# Altium PCB 64 Electrode Inverted Microscope.PcbDoc
Units mm, origin at the board's own origin, x right, y up, seen from the top; angles counter-clockwise.
Board outline 30 x 30 mm, 2 copper layers (Top Layer, Bottom Layer); 2 components, 65 nets, 130 pads, 0 vias.
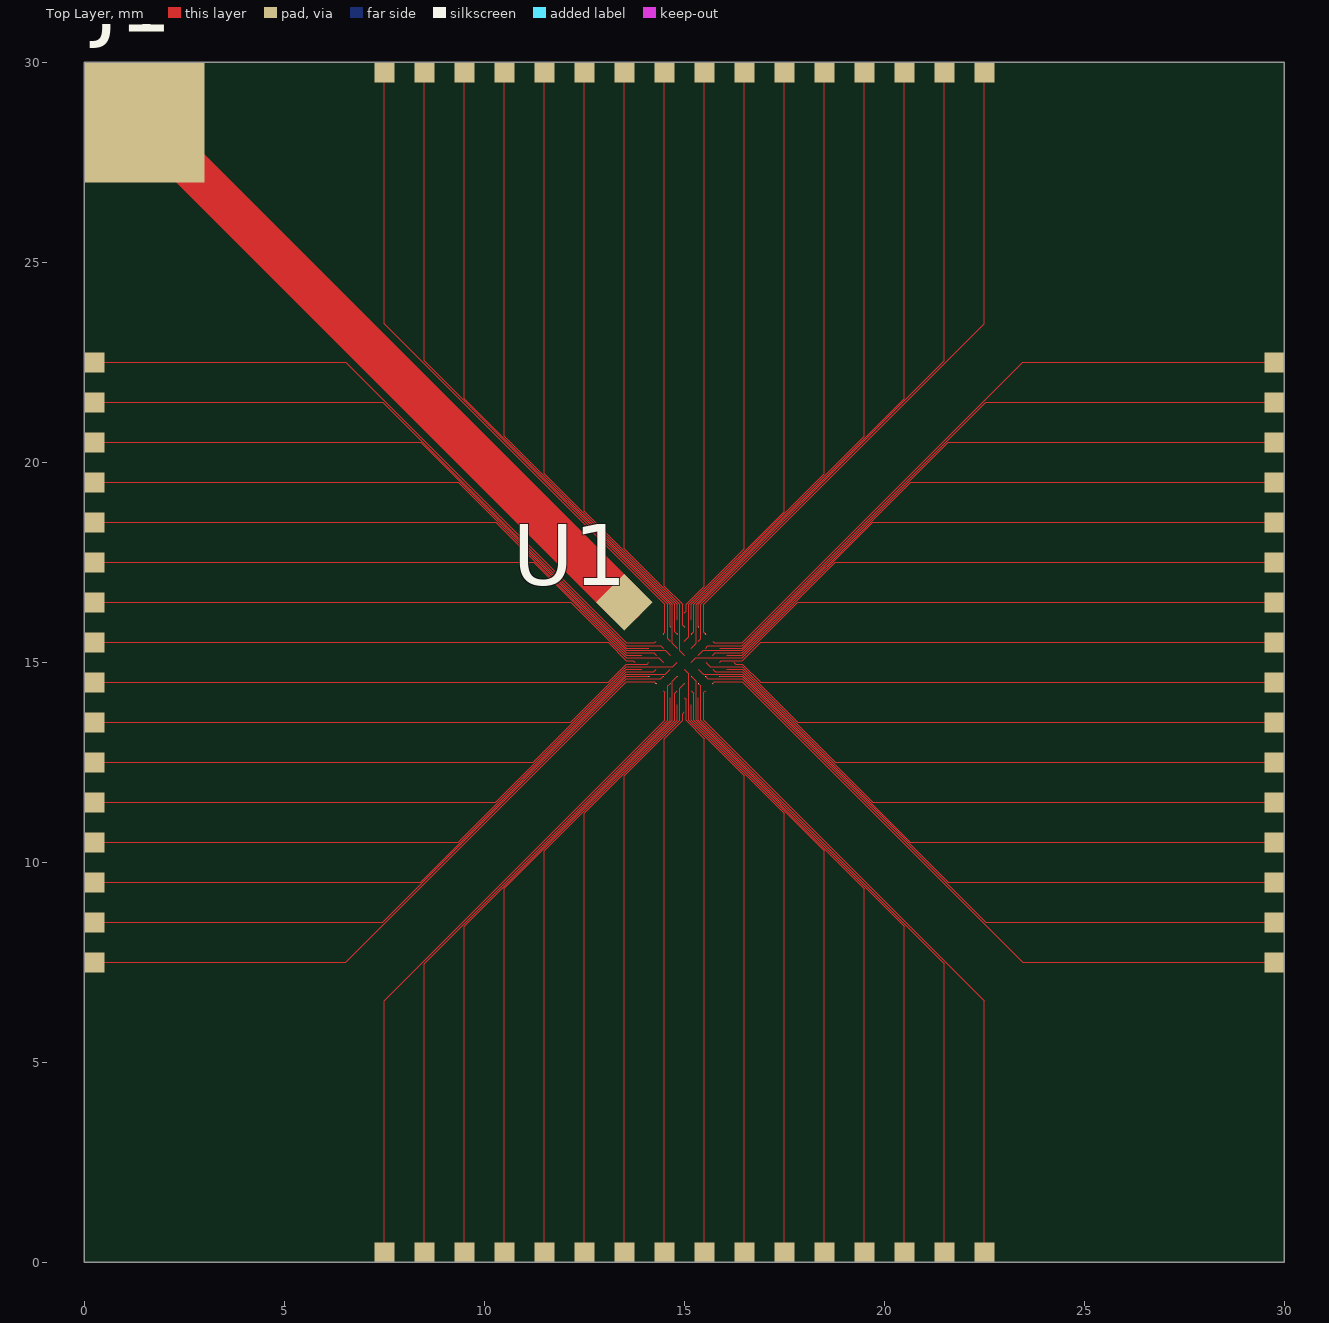
[diagram p0: Top Layer view]
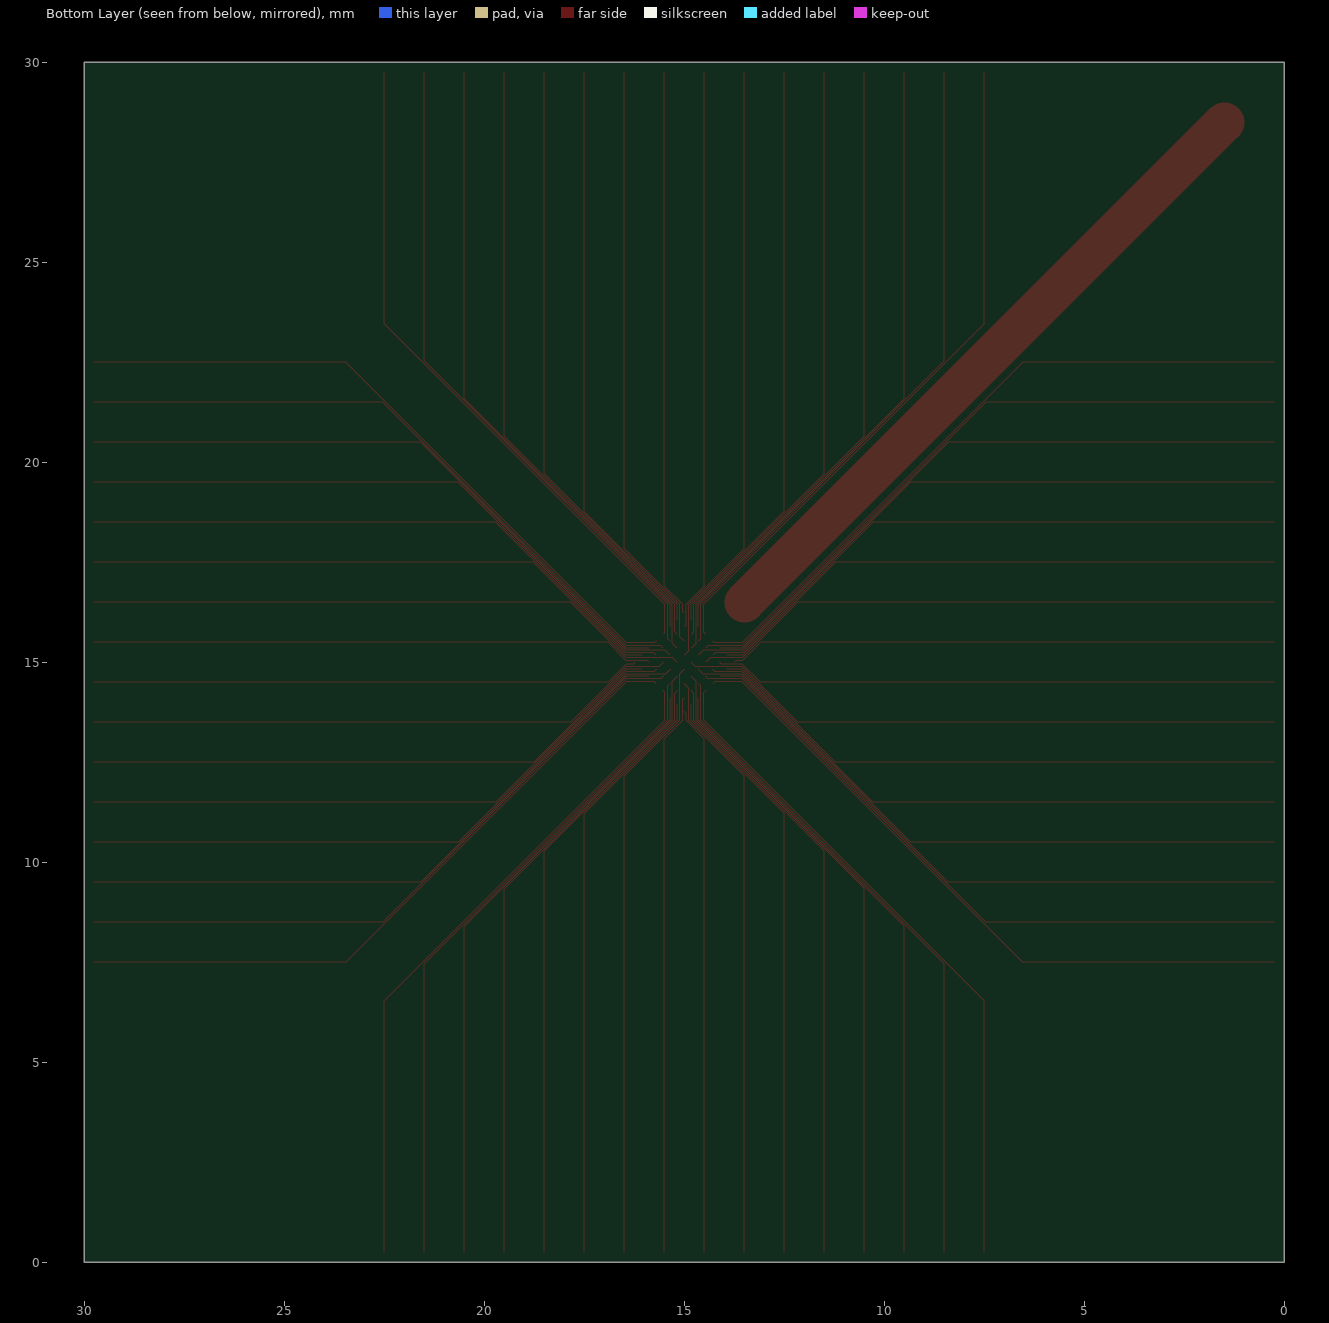
[diagram p1: Bottom Layer view, seen from below]

## Layer stack, top to bottom
Top Solder: solder mask 0.0102, Solder Resist, Dk 3.5
Top Layer: signal copper 0.0356
Dielectric 1: dielectric 0.32, FR-4, Dk 4.8
Bottom Layer: signal copper 0.0356
Bottom Solder: solder mask 0.0102, Solder Resist, Dk 3.5

## Board outline
0,0 0,30 30,30 30,0

## Design rules (kind name [scope] priority, off if disabled: settings)
Clearance [All] p1: gap=0.254 ignorepadtopadclearanceinfootprint=TRUE except(0: Arc-Hole Track-Hole SMDPad-Hole THPad-Hole Via-Hole Fill-Hole Poly-Hole Region-Hole Text-Hole; 0.005: Arc-Arc Arc-Track Arc-SMDPad Track-Track Track-SMDPad; 0.015: Arc-THPad Arc-Via Track-THPad Track-Via)
ComponentClearance [All] p1: gap=0 collisioncheckmode=3 verticalgap=0 showdistances=FALSE
PolygonConnect [All] p1: connectstyle=Relief reliefconductorwidth=0.254 reliefentries=4 polygonreliefangle="90 Angle" airgapwidth=0.254
RoutingVias [All] p1: holewidth=0.711 width=1.27 viastyle="Through Hole" minholewidth=0.711 minwidth=1.27 maxholewidth=0.711 maxwidth=1.27
SolderMaskExpansion [All] p1: expansion=0.102 istentingtop=FALSE
Width [All] p1: maxlimit=1 minlimit=0.005 preferedwidth=0.254 toplayer_prefwidth=0.25 bottomlayer_minwidth=0.254 bottomlayer_maxwidth=0.254 minimp=50.000000 maximp=50.000000 favimp=50.000000
29 further rules are at their usual default settings.

## Components (designator, comment, footprint, x,y, rotation, side; value= is the part's Value field where it differs from the comment)
J1 "Bond Pads (64)" "64 Electrode Footprint (Inverted Microscope)" 0,0 r0 top locked
U1 "Sensing Electrodes (64)" "64 Electrode Sensing Area (Inverted Microscope)" 15,16.237 r315 top locked

## Footprints (in the part's own frame and the unit in brackets; to place one, negate y for a bottom-side part, rotate by r counter-clockwise, add the part's x,y. Pads: shape width x height; smd on the part's side, far side on the other; paste and mask are expansions set on the pad)
"64 Electrode Footprint (Inverted Microscope)" [mm]
  rect 0.5x0.5 smd mask+0.102: 1(7.5,29.75) 2(8.5,29.75) 3(9.5,29.75) 4(10.5,29.75) 5(11.5,29.75) 6(12.5,29.75) 7(13.5,29.75) 8(14.5,29.75) 9(15.5,29.75) 10(16.5,29.75) 11(17.5,29.75) 12(18.5,29.75) 13(19.5,29.75) 14(20.5,29.75) 15(21.5,29.75) 16(22.5,29.75) 17(29.75,22.5) 18(29.75,21.5) 19(29.75,20.5) 20(29.75,19.5) 21(29.75,18.5) 22(29.75,17.5) 23(29.75,16.5) 24(29.75,15.5) 25(29.75,14.5) 26(29.75,13.5) 27(29.75,12.5) 28(29.75,11.5) 29(29.75,10.5) 30(29.75,9.5) 31(29.75,8.5) 32(29.75,7.5) 33(22.5,0.25) 34(21.5,0.25) 35(20.5,0.25) 36(19.5,0.25) 37(18.5,0.25) 38(17.5,0.25) 39(16.5,0.25) 40(15.5,0.25) 41(14.5,0.25) 42(13.5,0.25) 43(12.5,0.25) 44(11.5,0.25) 45(10.5,0.25) 46(9.5,0.25) 47(8.5,0.25) 48(7.5,0.25) 49(0.25,7.5) 50(0.25,8.5) 51(0.25,9.5) 52(0.25,10.5) 53(0.25,11.5) 54(0.25,12.5) 55(0.25,13.5) 56(0.25,14.5) 57(0.25,15.5) 58(0.25,16.5) 59(0.25,17.5) 60(0.25,18.5) 61(0.25,19.5) 62(0.25,20.5) 63(0.25,21.5) 64(0.25,22.5)
  rect 3x3 smd mask+0.102: 65(1.5,28.5)
"64 Electrode Sensing Area (Inverted Microscope)" [mm]
  round 0.01 smd mask+0.102: 1(0,0) 2(0.25,0) 3(0.5,0) 4(0.75,0) 5(1,0) 6(1.25,0) 7(1.5,0) 8(1.75,0) 9(0,-0.25) 10(0.25,-0.25) 11(0.5,-0.25) 12(0.75,-0.25) 13(1,-0.25) 14(1.25,-0.25) 15(1.5,-0.25) 16(1.75,-0.25) 17(0,-0.5) 18(0.25,-0.5) 19(0.5,-0.5) 20(0.75,-0.5) 21(1,-0.5) 22(1.25,-0.5) 23(1.5,-0.5) 24(1.75,-0.5) 25(0,-0.75) 26(0.25,-0.75) 27(0.5,-0.75) 28(0.75,-0.75) 29(1,-0.75) 30(1.25,-0.75) 31(1.5,-0.75) 32(1.75,-0.75) 33(0,-1) 34(0.25,-1) 35(0.5,-1) 36(0.75,-1) 37(1,-1) 38(1.25,-1) 39(1.5,-1) 40(1.75,-1) 41(0,-1.25) 42(0.25,-1.25) 43(0.5,-1.25) 44(0.75,-1.25) 45(1,-1.25) 46(1.25,-1.25) 47(1.5,-1.25) 48(1.75,-1.25) 49(0,-1.5) 50(0.25,-1.5) 51(0.5,-1.5) 52(0.75,-1.5) 53(1,-1.5) 54(1.25,-1.5) 55(1.5,-1.5) 56(1.75,-1.5) 57(0,-1.75) 58(0.25,-1.75) 59(0.5,-1.75) 60(0.75,-1.75) 61(1,-1.75) 62(1.25,-1.75) 63(1.5,-1.75) 64(1.75,-1.75)
  rect 1x1 smd mask+0.102: 65(-1.246,-0.875)

## Part data
J1: library part "Bond Pads (64—Inverted Microscope)", "64 Bond pads for 64 channel inverted microscope wa", Part Number="Bond Pads (64—Inverted Microscope)"
U1: library part "64 Electrode Sensing Area (Inverted Microscope)", "64 electrodes covering a 2 mm by 2mm area", Part Number="64 Electrode Sensing Area (Inverted Microscope)"

## Nets (pads, with @x,y where several pads share a name; then routed paths per layer and width w, separated by ;. In a path a pad name is that pad's centre, name@x,y a point inside that pad or via, vN(x,y) a via of type N, cw(c..) or ccw(c..) an arc to the next point about the centre after c; other vN are vias at no path point)
NetJ1_1: J1.9 U1.1 | length 13.7
  Top Layer w0.006: U1.1 15.045,16.282 15.045,16.45 15.5,16.905 15.5,29.249 J1.9
NetJ1_2: J1.11 U1.2 | length 14.7
  Top Layer w0.006: U1.2 15.177,16.448 17.5,18.77 J1.11
NetJ1_3: J1.14 U1.3 | length 16
  Top Layer w0.006: U1.3 15.354,16.449 ; 15.354,16.448 20.5,21.594 20.5,29.249 J1.14
NetJ1_4: J1.16 U1.4 | length 17
  Top Layer w0.006: 15.485,16.449 22.5,23.464 J1.16 ; 15.485,16.45 15.485,15.752 U1.4
NetJ1_5: J1.17 U1.5 | length 17
  Top Layer w0.006: U1.5 15.752,15.485 16.45,15.485 23.465,22.5 J1.17
NetJ1_6: J1.19 U1.6 | length 16
  Top Layer w0.006: U1.6 16.449,15.354 21.595,20.5 29.25,20.5 J1.19
NetJ1_7: J1.22 U1.7 | length 14.7
  Top Layer w0.006: U1.7 16.448,15.177 18.771,17.5 J1.22
NetJ1_8: J1.25 U1.8 | length 13.7
  Top Layer w0.006: U1.8 16.282,14.955 16.45,14.955 16.905,14.5 29.249,14.5 J1.25
NetJ1_9: J1.6 U1.9 | length 14.7
  Top Layer w0.006: J1.6 12.5,18.771 14.823,16.448 U1.9
NetJ1_10: J1.8 U1.10 | length 14.1
  Top Layer w0.006: J1.8 14.5,16.906 14.955,16.451 14.955,15.929 U1.10
NetJ1_11: J1.12 U1.11 | length 15.4
  Top Layer w0.006: U1.11 15.24,15.77 15.24,16.45 ; 15.24,16.449 18.5,19.709 J1.12
NetJ1_12: J1.15 U1.12 | length 16.8
  Top Layer w0.006: U1.12 15.415,15.592 15.415,16.45 ; 15.415,16.449 21.5,22.534 J1.15
NetJ1_13: J1.18 U1.13 | length 16.8
  Top Layer w0.006: U1.13 15.592,15.415 16.45,15.415 22.535,21.5 J1.18
NetJ1_14: J1.21 U1.14 | length 15.4
  Top Layer w0.006: U1.14 15.77,15.24 16.45,15.24 19.71,18.5 J1.21
NetJ1_15: J1.24 U1.15 | length 14.1
  Top Layer w0.006: U1.15 15.929,15.045 16.451,15.045 16.906,15.5 J1.24
NetJ1_16: J1.27 U1.16 | length 14.7
  Top Layer w0.006: U1.16 16.448,14.823 18.77,12.5 J1.27
NetJ1_17: J1.3 U1.17 | length 16
  Top Layer w0.006: J1.3 9.5,29.25 9.5,21.595 14.646,16.449 U1.17
NetJ1_18: J1.5 U1.18 | length 15.4
  Top Layer w0.006: J1.5 11.5,19.71 14.76,16.45 14.76,15.77 U1.18
NetJ1_19: J1.10 U1.19 | length 14.8
  Top Layer w0.006: U1.19 15.115,15.645 15.115,16.45 ; 15.115,16.449 16.5,17.834 J1.10
NetJ1_20: J1.13 U1.20 | length 16.2
  Top Layer w0.006: U1.20 15.296,15.472 15.296,16.45 ; 15.296,16.449 19.5,20.654 19.5,29.249 J1.13
NetJ1_21: J1.20 U1.21 | length 16.2
  Top Layer w0.006: U1.21 15.472,15.296 16.45,15.296 20.655,19.5 J1.20
NetJ1_22: J1.26 U1.22 | length 14.8
  Top Layer w0.006: U1.22 15.645,14.885 16.45,14.885 ; 16.449,14.885 17.834,13.5 J1.26
NetJ1_23: J1.28 U1.23 | length 15.4
  Top Layer w0.006: U1.23 15.77,14.76 16.45,14.76 ; 16.449,14.76 19.709,11.5 J1.28
NetJ1_24: J1.30 U1.24 | length 16
  Top Layer w0.006: U1.24 16.449,14.646 ; 16.448,14.646 21.594,9.5 29.249,9.5 J1.30
NetJ1_25: J1.1 U1.25 | length 17
  Top Layer w0.006: J1.1 7.5,23.465 14.515,16.45 14.515,15.752 U1.25
NetJ1_26: J1.2 U1.26 | length 16.8
  Top Layer w0.006: J1.2 8.5,22.535 14.585,16.45 14.585,15.592 U1.26
NetJ1_27: J1.4 U1.27 | length 16.2
  Top Layer w0.006: J1.4 10.5,20.655 14.704,16.45 14.704,15.472 U1.27
NetJ1_28: J1.7 U1.28 | length 15.2
  Top Layer w0.006: J1.7 13.5,17.835 14.885,16.45 14.885,15.292 U1.28
NetJ1_29: J1.23 U1.29 | length 15.2
  Top Layer w0.006: U1.29 15.292,15.115 16.45,15.115 17.835,16.5 J1.23
NetJ1_30: J1.29 U1.30 | length 16.2
  Top Layer w0.006: U1.30 15.472,14.704 16.45,14.704 ; 16.449,14.704 20.654,10.5 29.249,10.5 J1.29
NetJ1_31: J1.31 U1.31 | length 16.8
  Top Layer w0.006: U1.31 15.592,14.585 16.45,14.585 ; 16.449,14.585 22.534,8.5 J1.31
NetJ1_32: J1.32 U1.32 | length 17
  Top Layer w0.006: U1.32 15.752,14.515 16.45,14.515 ; 16.449,14.515 23.464,7.5 J1.32
NetJ1_33: J1.64 U1.33 | length 17
  Top Layer w0.006: J1.64 6.536,22.5 13.551,15.485 ; 13.55,15.485 14.248,15.485 U1.33
NetJ1_34: J1.63 U1.34 | length 16.8
  Top Layer w0.006: J1.63 7.466,21.5 13.551,15.415 ; 13.55,15.415 14.408,15.415 U1.34
NetJ1_35: J1.61 U1.35 | length 16.2
  Top Layer w0.006: J1.61 0.751,19.5 9.346,19.5 13.551,15.296 ; 13.55,15.296 14.528,15.296 U1.35
NetJ1_36: J1.55 U1.36 | length 15.2
  Top Layer w0.006: J1.55 12.165,13.5 13.55,14.885 14.708,14.885 U1.36
NetJ1_37: J1.39 U1.37 | length 15.2
  Top Layer w0.006: U1.37 15.115,14.708 15.115,13.55 16.5,12.165 J1.39
NetJ1_38: J1.36 U1.38 | length 16.2
  Top Layer w0.006: U1.38 15.296,14.528 15.296,13.55 19.5,9.345 J1.36
NetJ1_39: J1.34 U1.39 | length 16.8
  Top Layer w0.006: U1.39 15.415,14.408 15.415,13.55 21.5,7.465 J1.34
NetJ1_40: J1.33 U1.40 | length 17
  Top Layer w0.006: U1.40 15.485,14.248 15.485,13.55 22.5,6.535 J1.33
NetJ1_41: J1.62 U1.41 | length 16
  Top Layer w0.006: J1.62 0.751,20.5 8.406,20.5 13.552,15.354 ; 13.551,15.354 U1.41
NetJ1_42: J1.60 U1.42 | length 15.4
  Top Layer w0.006: J1.60 10.291,18.5 13.551,15.24 ; 13.55,15.24 14.23,15.24 U1.42
NetJ1_43: J1.58 U1.43 | length 14.8
  Top Layer w0.006: J1.58 12.166,16.5 13.551,15.115 ; 13.55,15.115 14.355,15.115 U1.43
NetJ1_44: J1.52 U1.44 | length 16.2
  Top Layer w0.006: J1.52 9.345,10.5 13.55,14.704 14.528,14.704 U1.44
NetJ1_45: J1.45 U1.45 | length 16.2
  Top Layer w0.006: J1.45 10.5,0.751 10.5,9.346 14.704,13.551 ; 14.704,13.55 14.704,14.528 U1.45
NetJ1_46: J1.42 U1.46 | length 14.8
  Top Layer w0.006: J1.42 13.5,12.166 14.885,13.551 ; 14.885,13.55 14.885,14.355 U1.46
NetJ1_47: J1.37 U1.47 | length 15.4
  Top Layer w0.006: U1.47 15.24,14.23 15.24,13.55 18.5,10.29 J1.37
NetJ1_48: J1.35 U1.48 | length 16
  Top Layer w0.006: U1.48 15.354,13.551 20.5,8.405 20.5,0.75 J1.35
NetJ1_49: J1.59 U1.49 | length 14.7
  Top Layer w0.006: J1.59 11.23,17.5 13.553,15.177 U1.49
NetJ1_50: J1.56 U1.50 | length 14.1
  Top Layer w0.006: J1.56 13.094,14.5 13.549,14.955 14.071,14.955 U1.50
NetJ1_51: J1.53 U1.51 | length 15.4
  Top Layer w0.006: J1.53 10.29,11.5 13.55,14.76 14.23,14.76 U1.51
NetJ1_52: J1.50 U1.52 | length 16.8
  Top Layer w0.006: J1.50 7.465,8.5 13.55,14.585 14.408,14.585 U1.52
NetJ1_53: J1.47 U1.53 | length 16.8
  Top Layer w0.006: J1.47 8.5,7.466 14.585,13.551 ; 14.585,13.55 14.585,14.408 U1.53
NetJ1_54: J1.44 U1.54 | length 15.4
  Top Layer w0.006: J1.44 11.5,10.291 14.76,13.551 ; 14.76,13.55 14.76,14.23 U1.54
NetJ1_55: J1.40 U1.55 | length 14.1
  Top Layer w0.006: U1.55 15.045,14.071 15.045,13.549 15.5,13.094 J1.40
NetJ1_56: J1.38 U1.56 | length 14.7
  Top Layer w0.006: U1.56 15.177,13.552 17.5,11.229 J1.38
NetJ1_57: J1.57 U1.57 | length 13.7
  Top Layer w0.006: J1.57 13.095,15.5 13.55,15.045 13.718,15.045 U1.57
NetJ1_58: J1.54 U1.58 | length 14.7
  Top Layer w0.006: J1.54 11.229,12.5 13.552,14.823 U1.58
NetJ1_59: J1.51 U1.59 | length 16
  Top Layer w0.006: J1.51 0.75,9.5 8.405,9.5 13.551,14.646 U1.59
NetJ1_60: J1.49 U1.60 | length 17
  Top Layer w0.006: J1.49 6.535,7.5 13.55,14.515 14.248,14.515 U1.60
NetJ1_61: J1.48 U1.61 | length 17
  Top Layer w0.006: J1.48 7.5,6.536 14.515,13.551 ; U1.61 14.515,14.248 14.515,13.55
NetJ1_62: J1.46 U1.62 | length 16
  Top Layer w0.006: J1.46 9.5,0.751 9.5,8.406 14.646,13.552 ; 14.646,13.551 U1.62
NetJ1_63: J1.43 U1.63 | length 14.7
  Top Layer w0.006: J1.43 12.5,11.23 14.823,13.553 U1.63
NetJ1_64: J1.41 U1.64 | length 13.7
  Top Layer w0.006: J1.41 14.5,0.751 14.5,13.095 14.955,13.55 14.955,13.718 U1.64
NetJ1_65: J1.65 U1.65 | length 17
  Top Layer w1: J1.65 U1.65